# EAGLE board buffered multiple 1U PANEL (EAGLE 7.7.0)
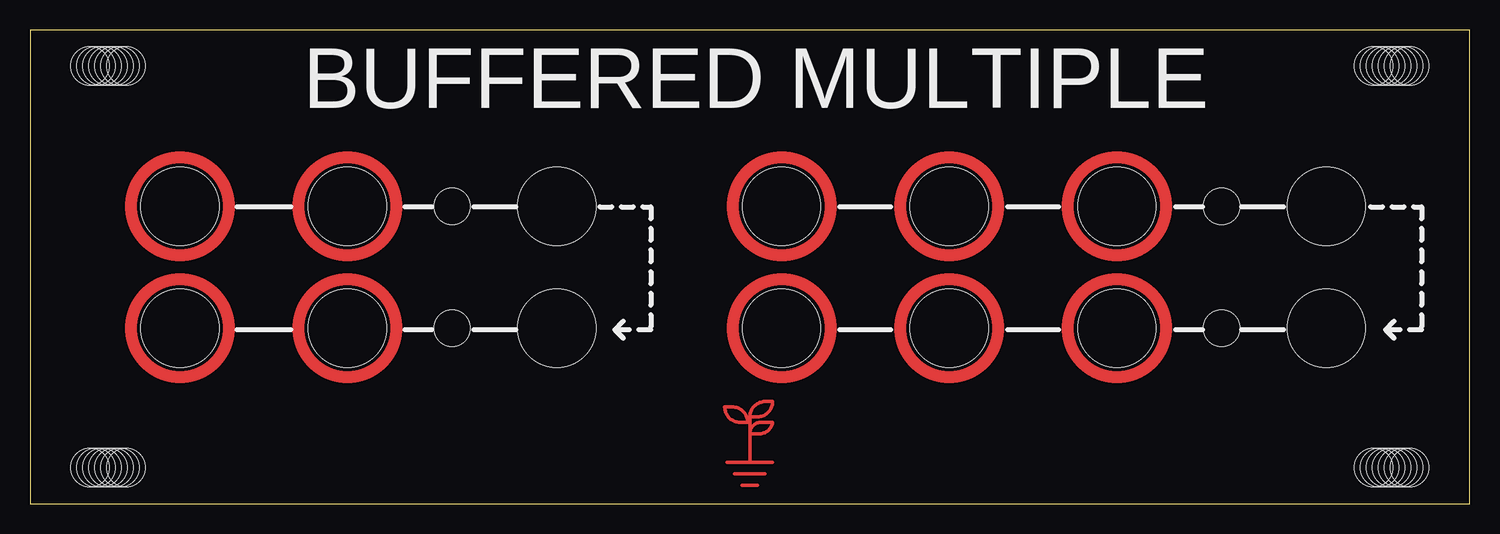
[diagram p0: board, top side]
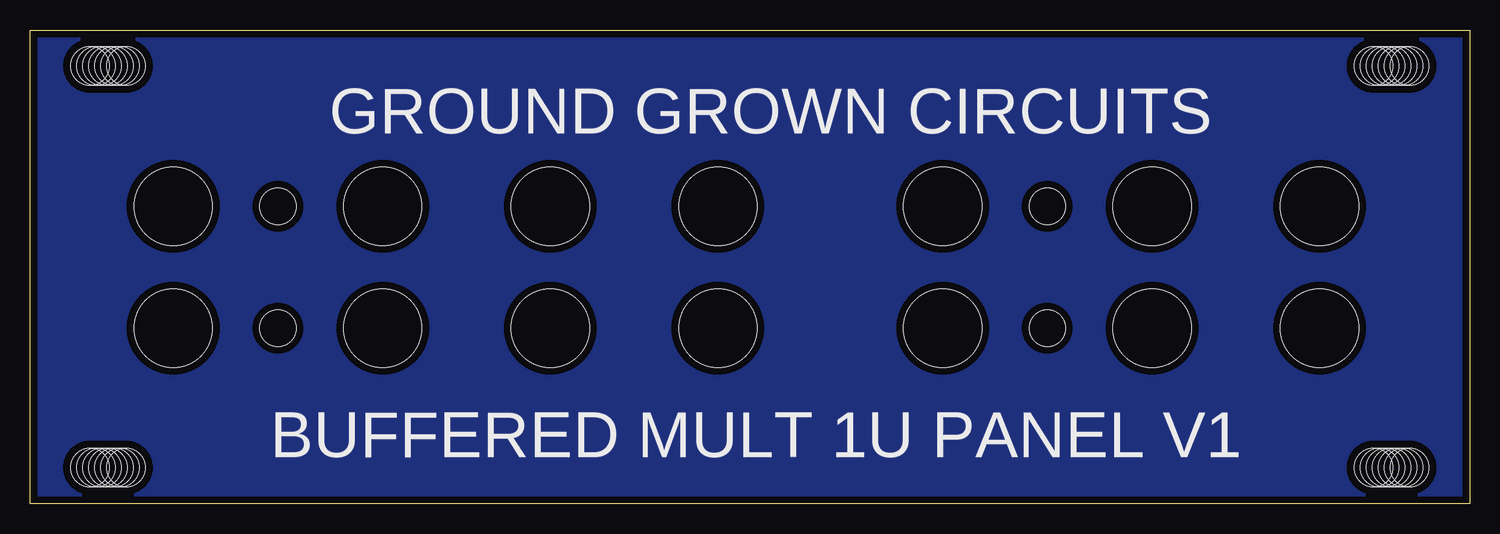
[diagram p1: board, bottom side, seen from below]

Size 120 x 39.5 mm. Coordinates in mm from the lower left corner, seen from the top.
Outline: 0,0 120,0 120,39.5 0,39.5 0,0
Copper layers (1*16): Top 0.035mm / dielectric 1.5mm / Bottom 0.035mm
Design rules "SparkFun": minimum track width 8mil, minimum drill 20mil, track to track 8mil, track to pad 8mil, pad to pad 8mil, via to via 8mil, smd to smd 8mil, copper to edge 8mil, drill to drill 8mil, minimum pad ring 12mil, minimum via ring 10mil, stop-mask expansion 4mil, vias tented up to drill 20mil, thermal gap 10mil

## Footprints (pad centres in the part's own frame; a part is rotated, then mirrored left to right if it is on the bottom)
LED_3MM_DRILL = hole 3: 0,0
MOUNT_DRILL = hole 3.2: 3,8; 3,7.5; 3,7; 3,6.5; 3,6; 3,5.5; 3,5
JACK_DRILL = hole 6.5: 0,0
JACK_DRILL_COPPER_EXS = hole 6.5: 0,0

## Placement (x,y rotation side)
D1  [LED_3MM_DRILL]  99.33,24.79 225 top
D2  [LED_3MM_DRILL]  99.33,14.62 45 top
D3  [LED_3MM_DRILL]  35.19,14.62 45 top
D4  [LED_3MM_DRILL]  35.19,24.79 225 top
E$1  [MOUNT_DRILL]  0,39.5 270 top
E$2  [MOUNT_DRILL]  0,0 90 bottom
E$3  [MOUNT_DRILL]  120,0 90 top
E$4  [MOUNT_DRILL]  120,39.5 270 bottom
E$5  [LOGO_SMALL_COPPER]  60,3.5 0 top
IN1  WQP-PJ301M-12_JACKOFFSET  [JACK_DRILL]  108.06,24.79 270 top
IN2  WQP-PJ301M-12_JACKOFFSET  [JACK_DRILL]  108.06,14.62 270 top
IN3  WQP-PJ301M-12_JACKOFFSET  [JACK_DRILL]  43.92,14.62 270 top
IN4  WQP-PJ301M-12_JACKOFFSET  [JACK_DRILL]  43.92,24.79 270 top
O1A  WQP-PJ301M-12_JACKOFFSET  [JACK_DRILL_COPPER_EXS]  90.6,24.79 90 top
O1B  [JACK_DRILL_COPPER_EXS]  76.63,24.79 90 top
O1C  [JACK_DRILL_COPPER_EXS]  62.66,24.79 90 top
O2A  WQP-PJ301M-12_JACKOFFSET  [JACK_DRILL_COPPER_EXS]  90.6,14.62 90 top
O2B  [JACK_DRILL_COPPER_EXS]  76.63,14.62 90 top
O2C  [JACK_DRILL_COPPER_EXS]  62.66,14.62 90 top
O3A  WQP-PJ301M-12_JACKOFFSET  [JACK_DRILL_COPPER_EXS]  26.46,14.62 90 top
O3B  [JACK_DRILL_COPPER_EXS]  12.49,14.62 90 top
O4A  WQP-PJ301M-12_JACKOFFSET  [JACK_DRILL_COPPER_EXS]  26.46,24.79 90 top
O4B  [JACK_DRILL_COPPER_EXS]  12.49,24.79 90 top

## Library data of the parts
D1-D4 E$1-E$5 IN1-IN4 O1A O1B O1C O2A O2B O2C O3A O3B O4A O4B = GroundGrownCircuits

## Tracks (layer width: path | path; a pad name or v marks a point on that pad's centre or on a via)
S$1
  pour Bottom (isolate 0.61): 0,0 0,39.5 120,39.5 120,0

## Text on the board
tPlace: BUFFERED MULTIPLE
bPlace: GROUND GROWN CIRCUITS | BUFFERED MULT 1U PANEL V1